# Altium PCB usb_edge.PcbDoc
Units mm, origin at the board's own origin, x right, y up, seen from the top; angles counter-clockwise.
Board outline 38.89 x 12 mm, 2 copper layers (Top Layer, Bottom Layer), stack 0.78 mm thick; 43 components, 27 nets, 161 pads, 48 vias.
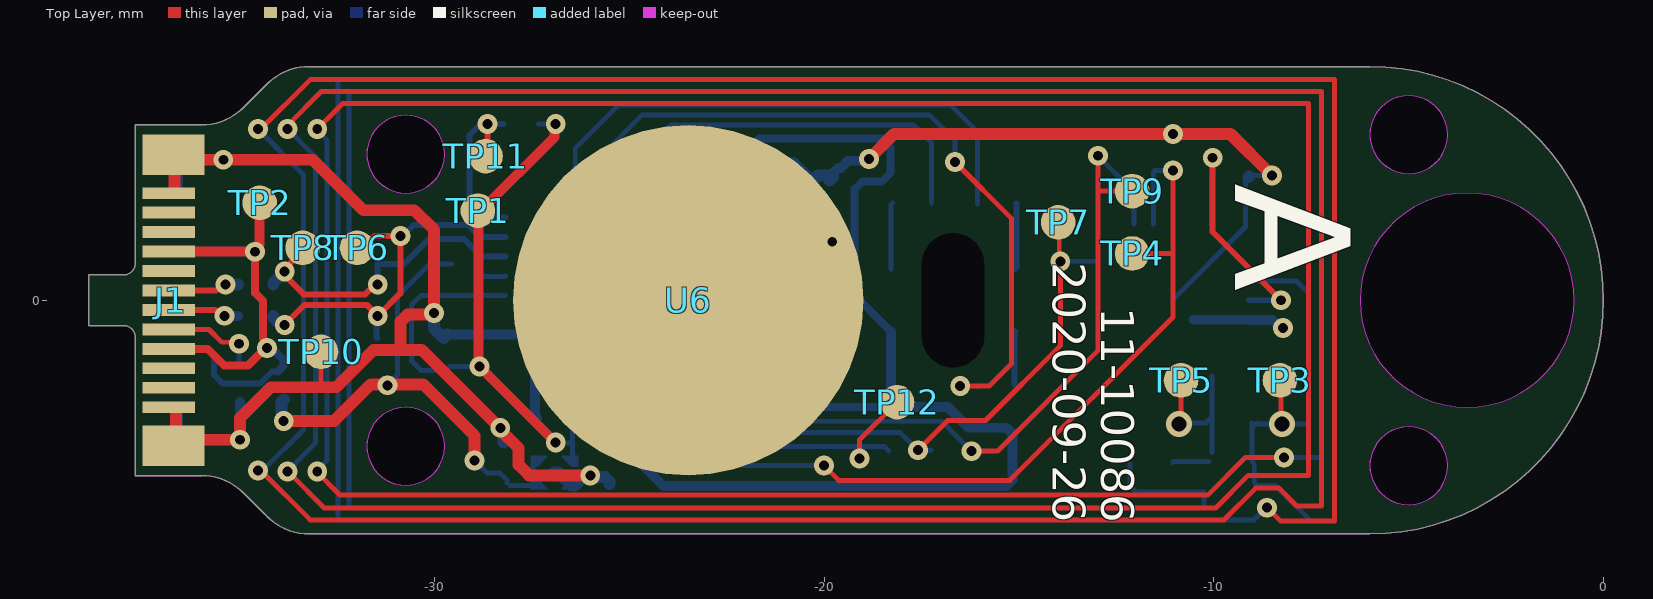
[diagram p0: Top Layer view]
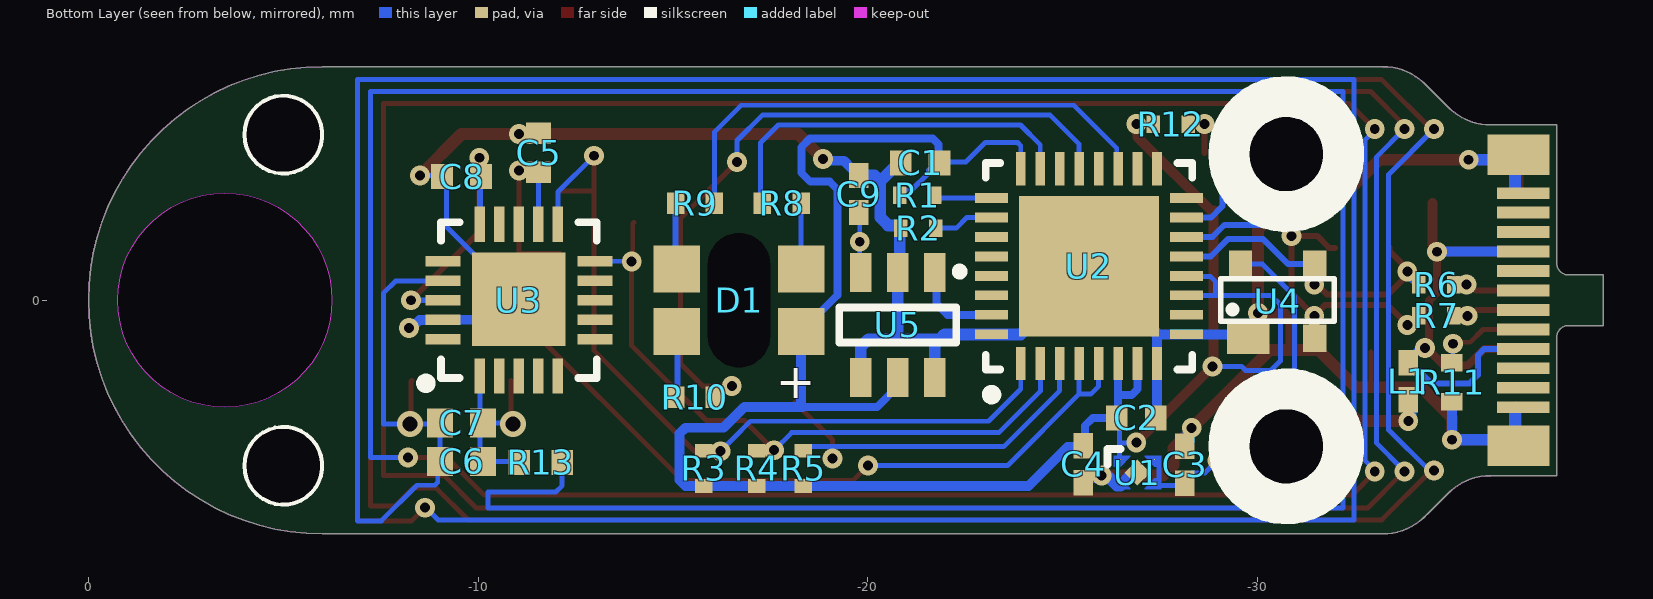
[diagram p1: Bottom Layer view, seen from below]
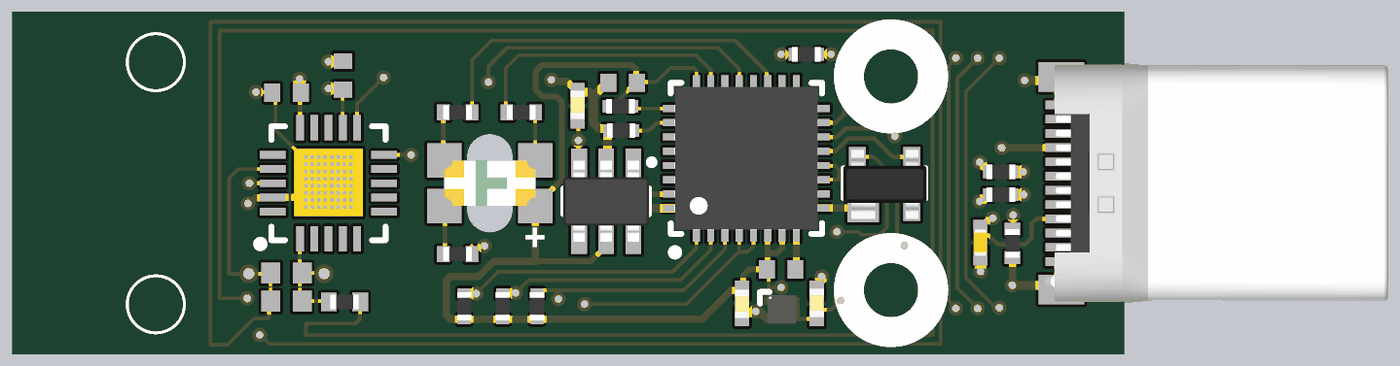
[diagram p2: 3D render of the assembled board from below, using the file's embedded part models]

## Layer stack, top to bottom
Top Solder: solder mask 0.01, Solder Resist, Dk 3.5
Top Layer: signal copper 0.035
Dielectric1: dielectric 0.71, FR-4, Dk 4.8
Bottom Layer: signal copper 0.035
Bottom Solder: solder mask 0.01, Solder Resist, Dk 3.5

## Board outline
-37.694,-4.15 -37.694,-4.5 -36,-4.5 cw(c-36.005,-6.052) -34.857,-5.008 -34.368,-5.492 ccw(c-33.22,-4.448) -33.225,-6 -6,-6 ccw(c-6,0) 0,0 ccw(c-6,0) -6,6 -33.225,6 ccw(c-33.22,4.448) -34.368,5.492 -34.857,5.008 cw(c-36.005,6.052) -36,4.5 -37.694,4.5 -37.694,4.15 -37.694,0.95 cw(c-37.994,0.95) -37.994,0.65 -38.894,0.65 -38.894,-0.65 -37.994,-0.65 cw(c-37.994,-0.95) -37.694,-0.95
cut-out: -6.25,0 ccw(c-3.5,0) -3.5,-2.75 ccw(c-3.5,0) -0.75,0 ccw(c-3.5,0) -3.5,2.75 ccw(c-3.5,0)
cut-out: -6,-4.25 ccw(c-5,-4.25) -5,-5.25 ccw(c-5,-4.25) -4,-4.25 ccw(c-5,-4.25) -5,-3.25 ccw(c-5,-4.25)
cut-out: -6,4.25 ccw(c-5,4.25) -5,3.25 ccw(c-5,4.25) -4,4.25 ccw(c-5,4.25) -5,5.25 ccw(c-5,4.25)
cut-out: -31.75,-3.75 ccw(c-30.75,-3.75) -30.75,-4.75 ccw(c-30.75,-3.75) -29.75,-3.75 ccw(c-30.75,-3.75) -30.75,-2.75 ccw(c-30.75,-3.75)
cut-out: -31.75,3.75 ccw(c-30.75,3.75) -30.75,2.75 ccw(c-30.75,3.75) -29.75,3.75 ccw(c-30.75,3.75) -30.75,4.75 ccw(c-30.75,3.75)

## Design rules (kind name [scope] priority, off if disabled: settings)
Clearance Clearance_1 [HasFootprint('HIROSE_CX60-24S-UNIT') vs OnLayer('Keep-Out Layer')] p1: gap=0 ignorepadtopadclearanceinfootprint=FALSE
Clearance [All] p2: gap=0.127 ignorepadtopadclearanceinfootprint=FALSE
ComponentClearance [All] p1: gap=0 collisioncheckmode=3 verticalgap=0.254 showdistances=FALSE
HoleSize [All] p1: absolutevalues=TRUE maxlimit=6.35 minlimit=0.025 maxpercent=80.000 minpercent=20.000
MinimumSolderMaskSliver [All] p1: minsoldermaskwidth=0.025
PolygonConnect [All] p1: connectstyle=Relief reliefconductorwidth=0.254 reliefentries=4 polygonreliefangle="90 Angle" airgapwidth=0.254
RoutingVias [All] p1: holewidth=0.254 width=0.508 viastyle="Through Hole" minholewidth=0.254 minwidth=0.508 maxholewidth=1.27 maxwidth=1.905
SilkToSilkClearance [All] p1: silktosilkclearance=0
SilkToSolderMaskClearance SilkscreenOverComponentPads [IsPad] p1: minsilkscreentomaskgap=0 clearancetoexposedcopper=TRUE
SolderMaskExpansion [All] p1: expansion=0.102 istentingtop=FALSE
SupplyNets "Schematic Supply Nets_3" [InNet('GND')] p1: voltage=0.000
SupplyNets "Schematic Supply Nets_2" [InNet('+3v3')] p2: voltage=0.000
SupplyNets "Schematic Supply Nets_1" [InNet('+VBUS')] p3: voltage=0.000
SupplyNets "Schematic Supply Nets" [InNet('+5v0-VBUS')] p4: voltage=0.000
Width "Schematic Width Constraint_1" [InNet('LA')] p1: maxlimit=0.127 minlimit=0.127 preferedwidth=0.127
Width "Schematic Width Constraint" [InNet('LB')] p2: maxlimit=0.127 minlimit=0.127 preferedwidth=0.127
Width [All] p3: maxlimit=5.08 minlimit=0.127 preferedwidth=0.127
25 further rules are at their usual default settings.

## Components (designator, comment, footprint, x,y, rotation, side; value= is the part's Value field where it differs from the comment)
C1 "0.1µF" C0402_0.55MM_MD -21.35,3.525 r180 bottom
C2 "0.1µF" C0402_0.55MM_MD -26.899,-3.023 r0 bottom
C3 "1µF" C0402_0.55MM_HD -28.146,-4.224 r270 bottom
C4 "1µF" C0402_0.55MM_HD -25.534,-4.21 r90 bottom
C5 "0.1µF" C0402_0.55MM_MD -11.557,3.785 r270 bottom
C6 "0.1pF" C0402_0.55MM_LD -9.576,-4.14 r0 bottom
C7 "75pF" C0402_0.55MM_LD -9.576,-3.15 r0 bottom
C8 "0.1µF" C0402_0.55MM_MD -9.576,3.175 r0 bottom
C9 "10pF" C0402_0.55MM_HD -19.775,2.725 r270 bottom
D1 "156120M173000" "WURTH_WL-SFRW_1206 RECTANGULAR_REVERSE USE" -16.7,0 r0 bottom
J1 "632712000112" 632712000112 -37.694,0 r270 top
L1 "ACML-0402HC-221-T" C0402_HD -33.884,-2.083 r270 bottom
R1 "10kΩ" R0402_0.40MM_HD -21.275,2.7 r180 bottom
R2 "10kΩ" R0402_0.40MM_HD -21.3,1.85 r0 bottom
R3 "10kΩ" R0402_0.40MM_HD -15.8,-4.318 r90 bottom
R4 "10kΩ" R0402_0.40MM_HD -17.15,-4.318 r90 bottom
R5 "10kΩ" R0402_0.40MM_HD -18.35,-4.318 r90 bottom
R6 "33" R0402_0.40MM_HD -34.6,0.4 r0 bottom
R7 "33" R0402_0.40MM_HD -34.6,-0.4 r0 bottom
R8 "59" R0402_0.40MM_MD -17.8,2.489 r180 bottom
R9 "287" R0402_0.40MM_MD -15.57,2.489 r0 bottom
R10 "59" R0402_0.40MM_MD -15.57,-2.489 r0 bottom
R11 "5.1k" R0402_0.40MM_MD -35.001,-2.108 r90 bottom
R12 "10kΩ" R0402_0.40MM_HD -27.788,4.521 r180 bottom
R13 "0Ω" R0402_0.40MM_LD -11.608,-4.166 r180 bottom
TP1 "SMT Testpoint 35mil" SMT_TP-35#1 -28.9,2.3 r0 top
TP2 "SMT Testpoint 35mil" SMT_TP-35#1 -34.5,2.5 r0 top
TP3 "SMT Testpoint 35mil" SMT_TP-35#1 -8.306,-2.057 r0 top
TP4 "SMT Testpoint 35mil" SMT_TP-35#1 -12.1,1.2 r0 top
TP5 "SMT Testpoint 35mil" SMT_TP-35#1 -10.846,-2.057 r0 top
TP6 "SMT Testpoint 35mil" SMT_TP-35#2 -32,1.35 r0 top
TP7 "SMT Testpoint 35mil" SMT_TP-35#1 -14,2 r0 top
TP8 "SMT Testpoint 35mil" SMT_TP-35#3 -33.397,1.354 r0 top
TP9 "SMT Testpoint 35mil" SMT_TP-35#1 -12.1,2.8 r0 top
TP10 "SMT Testpoint 35mil" SMT_TP-35#1 -32.925,-1.325 r0 top
TP11 "SMT Testpoint 35mil" SMT_TP-35#1 -28.7,3.7 r0 top
TP12 "SMT Testpoint 35mil" SMT_TP-35#1 -18.136,-2.616 r0 top
U1 "TLV74033PDQNR" X2SON -26.927,-4.424 r180 bottom
U2 "MCXA143VFM" QFN50P500X500X65_HS-33N -25.683,0.874 r90 bottom locked
U3 "P71D600P" QFN20 -11.049,0 r90 bottom
U4 "PRTR5V0U2X,215" SOT143B -29.775,-0.975 r180 bottom locked
U5 "TTP223N-BA6" SOT23127P600-8N -20.775,-0.635 r270 bottom
U6 "TOUCH-SENSE-PAD" circular__9.7mm -22.879,0 r180 top locked

## Footprints (in the part's own frame and the unit in brackets; to place one, negate y for a bottom-side part, rotate by r counter-clockwise, add the part's x,y. Pads: shape width x height; smd on the part's side, far side on the other; paste and mask are expansions set on the pad)
632712000112 [mm]
  rect 0.3x1.35 smd: A1(2.75,0.855) A2(2.25,0.855) A3(1.75,0.855) A4(1.25,0.855) A5(0.75,0.855) A6(0.25,0.855) A7(-0.25,0.855) A8(-0.75,0.855) A9(-1.25,0.855) A10(-1.75,0.855) A11(-2.25,0.855) A12(-2.75,0.855)
  rect 0.3x1.35 smd far side: B1(-2.75,0.855) B2(-2.25,0.855) B3(-1.75,0.855) B4(-1.25,0.855) B5(-0.75,0.855) B6(-0.25,0.855) B7(0.25,0.855) B8(0.75,0.855) B9(1.25,0.855) B10(1.75,0.855) B11(2.25,0.855) B12(2.75,0.855)
  rect 1.04x1.6 smd: S1(3.73,0.98) S2(-3.73,0.98)
  rect 1.04x1.6 smd far side: S3(3.73,0.98) S4(-3.73,0.98)
  body extent -4.21,-10.45 4.21,1.55, height 1.46
C0402_0.55MM_HD [mm] "Capacitor 0402 0.55mm Height- High Density"
  rect 0.65x0.5 smd: 1(-0.475,0) 2(0.475,0)
  body extent -0.52,-0.25 0.48,0.25, height 0.55
C0402_0.55MM_LD [mm] "Chip Capacitor, 2-Leads, Body 1.00x0.50mm, IPC Low Density"
  rect 0.66x0.74 smd: 1(-0.55,0) 2(0.55,0)
  body extent -0.5,-0.25 0.5,0.25, height 0.55
C0402_0.55MM_MD [mm] "Chip Capacitor, 2-Leads, Body 1.00x0.50mm, IPC Medium Density"
  rect 0.56x0.64 smd: 1(-0.5,0) 2(0.5,0)
  body extent -0.5,-0.25 0.5,0.25, height 0.55
C0402_HD [mm] "Capacitor 0402 - High Density"
  rect 0.65x0.5 smd: 1(-0.475,0) 2(0.475,0)
  body extent -0.5,-0.25 0.5,0.25, height 0.55
circular__9.7mm [mm]
  round 9 smd paste-2539.97 mask+0.102: 1(0.621,0)
QFN20 [mm] "QFN, 20-Leads, Body 4.0x4.0mm (max), Pitch 0.50mm, IPC High Density"
  rect 0.9x0.27 smd: 1(-1.95,1) 2(-1.95,0.5) 3(-1.95,0) 4(-1.95,-0.5) 5(-1.95,-1) 11(1.95,-1) 12(1.95,-0.5) 13(1.95,0) 14(1.95,0.5) 15(1.95,1)
  rect 0.27x0.9 smd: 6(-1,-1.95) 7(-0.5,-1.95) 8(0,-1.95) 9(0.5,-1.95) 10(1,-1.95) 16(1,1.95) 17(0.5,1.95) 18(0,1.95) 19(-0.5,1.95) 20(-1,1.95)
  rect 2.4x2.4 smd paste-1.27: 21(0.025,0)
  silkscreen extent -2.26,-2 2,2.51, body extent -1.94,-2 2.06,2, height 0.8
QFN50P500X500X65_HS-33N [mm] "QFN, 32-Leads, Body 5.00x5.00mm, Pitch 0.50mm, Thermal Pad 3.60x3.50mm, IPC Medium Density"
  rect 0.85x0.25 smd: 1(-2.5,1.75) 2(-2.5,1.25) 3(-2.5,0.75) 4(-2.5,0.25) 5(-2.5,-0.25) 6(-2.5,-0.75) 7(-2.5,-1.25) 8(-2.5,-1.75) 17(2.5,-1.75) 18(2.5,-1.25) 19(2.5,-0.75) 20(2.5,-0.25) 21(2.5,0.25) 22(2.5,0.75) 23(2.5,1.25) 24(2.5,1.75)
  rect 0.25x0.85 smd: 9(-1.75,-2.5) 10(-1.25,-2.5) 11(-0.75,-2.5) 12(-0.25,-2.5) 13(0.25,-2.5) 14(0.75,-2.5) 15(1.25,-2.5) 16(1.75,-2.5) 25(1.75,2.5) 26(1.25,2.5) 27(0.75,2.5) 28(0.25,2.5) 29(-0.25,2.5) 30(-0.75,2.5) 31(-1.25,2.5) 32(-1.75,2.5)
  rect 3.6x3.6 smd: 33(0,0)
  silkscreen extent -3.42,-2.65 2.65,2.65, body extent -2.51,-2.51 2.51,2.51, height 0.65
R0402_0.40MM_HD [mm] "Resistor 0402 High Density"
  rect 0.35x0.45 smd: 1(-0.45,0) 2(0.45,0)
  body extent -0.5,-0.25 0.5,0.25, height 0.4
R0402_0.40MM_LD [mm] "Resistor 0402 Low Density"
  rect 0.55x0.65 smd: 1(-0.55,0) 2(0.55,0)
  body extent -0.5,-0.25 0.5,0.25, height 0.4
R0402_0.40MM_MD [mm] "Resistor 0402 Medium Density"
  rect 0.45x0.55 smd: 1(-0.5,0) 2(0.5,0)
  body extent -0.5,-0.25 0.5,0.25, height 0.4
SMT_TP-35#1 [mil] ".035\" SMT Test pad"
  round 35 smd paste-10: 1(0,0)
SMT_TP-35#2 [mil] ".035\" SMT Test pad"
  round 35 smd paste-10: 1(0,-0.15)
SMT_TP-35#3 [mil] ".035\" SMT Test pad"
  round 35 smd paste-10: 1(0,-0.31)
SOT143B [mm] "SOT143B"
  rect 1.1x0.8 smd: 1(0,0)
  rect 0.6x0.7 smd: 2(1.702,0) 3(1.702,1.9) 4(-0.2,1.9)
  silkscreen extent -0.71,0.43 2.21,1.52, body extent -0.7,-0.27 2.22,2.15, height 1
SOT23127P600-8N [mm]
  rect 1x0.549 smd: 1(-1.35,0.95) 2(-1.35,0) 3(-1.35,-0.95) 4(1.35,-0.95) 5(1.35,0) 6(1.35,0.95)
  silkscreen extent -1.47,-1.5 0.45,1.69, body extent -1.43,-1.5 1.43,1.5, height 1.26
"WURTH_WL-SFRW_1206 RECTANGULAR_REVERSE USE" [mm] "SMD Full-color Reverse mount LED, body 3.2x1.6mm"
  rect 1.2x1.2 smd: 1(-1.596,0.8) 2(-1.596,-0.8) 3(1.596,-0.8) 4(1.596,0.8)
  oval 0x3.45 hole 1.6 slot 3.45 at 90 deg unplated mask+0: MH1(0,0)
  body extent -1.6,-0.8 1.6,0.8, height 0.28
X2SON [mm]
  round 0.025 smd paste+0 mask+0.05: 1(-0.435,0.335) 2(-0.435,-0.335) 3(0.435,-0.335) 4(0.435,0.335)
  rect 0.48x0.48 smd rot 135 paste+0.002 mask+0.052: 5(0,0)
  silkscreen extent -0.76,0.2 -0.43,0.61, body extent -0.5,-0.5 0.5,0.5, height 0.4

## Part data
C1 C2 C5 C8: library part GCM155R71C104KA55J, "CAP CER 0.1UF 16V X7R 0402", Manufacturer="Murata Electronics", Operating Temperature="-55°C ~ 125°C", Package=402, Ratings=AEC-Q200, Supplier Part Number 1=490-7998-1-ND, Temperature Coefficient=X7R, Tolerance=±10%, Voltage - Rated=16V, Category=Capacitors, ComponentLink1Description="Datasheet (Internal)", ComponentLink1URL=https://psearch.en.murata.com/capacitor/product/GCM155R71C104KA55%23.pdf, ComponentLink2Description="Datasheet (External)", ComponentLink2URL=https://psearch.en.murata.com/capacitor/product/GCM155R71C104KA55%23.pdf, Manufacturer Part Number=GCM155R71C104KA55J, Substitution Notes="0.1µF , 16V , ±10% , X7R , -55°C ~ 125°C , AEC-Q200 , 0402", Supplier 1=Digikey, Thickness (Max)=0.55MM
C3 C4: library part GRT155R70J105KE01D, "CAP CERAMIC 1UF 6.3V X7R 10% PAD", Manufacturer="Murata Electronics", Operating Temperature="-55°C ~ 125°C", Package=0402, Ratings=AEC-Q200, Supplier Part Number 1=490-18216-1-ND, Temperature Coefficient=X7R, Tolerance=±10%, Voltage - Rated=6.3V, Category=Capacitors, ComponentLink1Description="Datasheet (Internal)", ComponentLink1URL=https://search.murata.co.jp/Ceramy/image/img/A01X/G101/ENG/GRT155R70J105KE01-01.pdf, ComponentLink2Description="Datasheet (External)", ComponentLink2URL=https://search.murata.co.jp/Ceramy/image/img/A01X/G101/ENG/GRT155R70J105KE01-01.pdf, Manufacturer Part Number=GRT155R70J105KE01D, Substitution Notes="1µF , 6.3V , ±10% , X7R , -55°C ~ 125°C , AEC-Q200 , 0402", Supplier 1=Digikey, Thickness (Max)=0.55MM
C6: library part GCQ1555C1HR10BB01D, "CAP CER 0.1PF 50V C0G/NP0 0402", Internal Part Number=nan, Manufacturer="Murata Electronics", Operating Temperature="-55°C ~ 125°C", Package=402, Ratings=AEC-Q200, Supplier Part Number 1=490-17533-1-ND, Temperature Coefficient="C0G, NP0", Tolerance=±0.1pF, Voltage - Rated=50V, cad-reference=GCQ1555C1HR10BB01D, Category=Capacitors, ComponentLink1Description="Datasheet (Internal)", ComponentLink1URL=https://search.murata.co.jp/Ceramy/image/img/A01X/G101/ENG/GCQ1555C1HR10BB01-01.pdf, ComponentLink2Description="Datasheet (External)", ComponentLink2URL=https://search.murata.co.jp/Ceramy/image/img/A01X/G101/ENG/GCQ1555C1HR10BB01-01.pdf, JLCPCB Part #=nan, kicad-footprint=C0402_0.55MM_MD:C0402_0.55MM_MD, kicad-symbol=Capacitor:C_2P_NP, Manufacturer Part Number=GCQ1555C1HR10BB01D, Substitution Notes="0.1pF , 50V , ±0.1pF , C0G, NP0 , -55°C ~ 125°C , AEC-Q200 , 0402", Supplier 1=Digikey, Thickness (Max)=0.55MM
C7: library part GCM1555C1H750FA16J, "CAP CER 75PF 50V C0G/NP0 0402", Manufacturer="Murata Electronics", Operating Temperature="-55°C ~ 105°C", Package=402, Ratings=AEC-Q200, Temperature Coefficient="C0G, NP0", Tolerance=±1%, Voltage - Rated=50V, cad-reference=GCM1555C1H750FA16J, Category=Capacitors, kicad-footprint=C0402_0.55MM_MD:C0402_0.55MM_MD, kicad-symbol=Capacitor:C_2P_NP, Manufacturer Part Number=GCM1555C1H750FA16J, Substitution Notes="75pF , 50V , ±1% , C0G, NP0 , -55°C ~ 125°C , AEC-Q200 , 0402", Thickness (Max)=0.55MM
C9: library part GCQ1555C1H100JB01D, "CAP CER 10PF 50V C0G/NP0 0402", Manufacturer="Murata Electronics", Operating Temperature="-55°C ~ 125°C", Package=0402, Ratings=AEC-Q200, Supplier Part Number 1=490-17423-1-ND, Temperature Coefficient="C0G, NP0", Tolerance=±5%, Voltage - Rated=50V, Category=Capacitors, ComponentLink1Description="Datasheet (Internal)", ComponentLink1URL=https://search.murata.co.jp/Ceramy/image/img/A01X/G101/ENG/GCQ1555C1H100JB01-01.pdf, ComponentLink2Description="Datasheet (External)", ComponentLink2URL=https://search.murata.co.jp/Ceramy/image/img/A01X/G101/ENG/GCQ1555C1H100JB01-01.pdf, Manufacturer Part Number=GCQ1555C1H100JB01D, Substitution Notes="10pF , 50V , ±5% , C0G, NP0 , -55°C ~ 125°C , AEC-Q200 , 0402", Supplier 1=Digikey, Thickness (Max)=0.55MM
D1: "Wl-sfrw SMT Full-color Reverse M", Manufacturer="Würth Elektronik", Supplier Part Number 1=732-13408-1-ND, Category=Diodes, CategorySort=400, Manufacturer Part Number=156120M173000, Pricing 1="1 = 0.96000, 10 = 0.82500, 50 = 0.72340, 250 = 0.64632, 500 = 0.57730 (USD)", Stock 1=2978, Supplier 1=Digikey
J1: "USB-C (USB TYPE-C) USB 3.2 Gen 2 (USB 3.1 Gen 2, Superspeed + (USB 3.1)) Plug Connector 24 Position Board Edge, Straddle Mount", Manufacturer="Würth Elektronik", cad-reference=632712000112, classification=connector/USB, id=019a404e-48ff-7478-bb0c-33fa9a6e0fc4, kicad-footprint=632712000112, kicad-footprint-path=footprints\632712000112.kicad_mod, kicad-symbol=632712000112, kicad-symbol-path=symbols\632712000112.kicad_sym, Manufacturer Part Number=632712000112
L1: "Ind Chip Bead Multi-Layer 220Ohm 25% 100MHz Ferrite 1A 0402 T/R", Case Code (Imperial)=0402, Case Code (Metric)=1005, Current Rating=1A, DC Resistance (DCR)=250mR, Manufacturer=Abracon, Max Operating Temperature=125°C, Min Operating Temperature=-55°C, Package Quantity=1, Supplier Part Number 1=815-ACML-0402HC-221T, Test Frequency=100MHz, Tolerance=25%, Case/Package=0402, Category="Ferrite Beads and Chips", ComponentLink1Description=https://datasheet.ciiva.com/41798/acml-0402hc-41798311.pdf?src-supplier=Digikey, ComponentLink1URL=https://datasheet.ciiva.com/41798/acml-0402hc-41798311.pdf?src-supplier=Digikey, Height=0.026inch, Impedance=220R, Length=0.039inch, Manufacturer Part Number=ACML-0402HC-221-T, Max Current Rating=1A, Max DC Current=1A, Mounting Technology="Surface Mount", Number of Channels=1, Number of Lines=1, Packaging="Tape and Reel", Pricing="1=0.1, 10=0.032, 50=0.032, 100=0.023, 1000=0.015, 10000=0.015 (USD)", RoHS=Yes, RoHS Compliant=Yes, Series=ACML-HC, Shielding=Unshielded, Stock 1=3420, Supplier 1=Mouser, Termination=SMD/SMT, Weight=2.3E-05oz, Width=0.02inch
R1 R2 R3 R4 R5 R12: library part ERJ-2RKF1002X, "RES 10K OHM 1/10W 1% 0402 SMD", Limiting Element Voltage=50, Manufacturer="Panasonic Electronic Components", Maximum Overload Voltage=100, Maximum Working Voltage=31.6V, Package="0402 (1005 Metric)", Package Power="0402  (0.1W)", Power (Watts)="0.1W- 1/10W", Ratings=AEC-Q200, Resistance (Ohms)=10k, Sort Value=10000, Sort Value Package=402_10000, Supplier Package=402, Supplier Part Number 1=P10.0KLCT-ND, Temperature Coefficient=±100ppm/°C, Tolerance=±1%, Category=Resistors, Composition="Thick Film", Features=0, Height=0.40MM, Manufacturer 1="Panasonic Electronic Components", Manufacturer Part Number=ERJ-2RKF1002X, Manufacturer Part Number 1=ERJ-2RKF1002X, Packaging="Cut Tape (CT)", Substitution Notes="10k , ±1% , 0402 , AEC-Q200", Supplier 1=Digi-Key
R6 R7: library part ERJ-2RKF33R0X, "RES 33 OHM 1/10W 1% 0402 SMD", Limiting Element Voltage=50, Manufacturer="Panasonic Electronic Components", Maximum Overload Voltage=100, Maximum Working Voltage=1.8V, Package="0402 (1005 Metric)", Package Power="0402  (0.1W)", Power (Watts)="0.1W- 1/10W", Ratings=AEC-Q200, Sort Value Package=402_33, Supplier Package=0402, Supplier Part Number 1=P33.0LCT-ND, Temperature Coefficient=±100ppm/°C, Tolerance=±1%, Category=Resistors, ComponentLink1Description="Internal Datasheet", ComponentLink1URL="datasheets\Panasonic Electronic Components\AOA0000CE2.pdf", ComponentLink2Description="External Datasheet", ComponentLink2URL=http://industrial.panasonic.com/www-data/pdf/AOA0000/AOA0000CE2.pdf, Composition="Thick Film", Features=-, Height=0.40MM, Manufacturer Part Number=ERJ-2RKF33R0X, Number of Terminations=2, Packaging="Cut Tape (CT)", Resistance (Ohms)=33, Size / Dimension="0.039\" L x 0.020\" W (1.00mm x 0.50mm)", Sort Value=33, Substitution Notes="33 , ±1% , 0402 , AEC-Q200", Supplier 1=Digi-Key
R8 R10: library part ERJ-2RKF59R0X, "RES 59 OHM 1/10W 1% 0402 SMD", Limiting Element Voltage=50, Manufacturer="Panasonic Electronic Components", Maximum Overload Voltage=100, Maximum Working Voltage=2.4V, Package="0402 (1005 Metric)", Package Power="0402  (0.1W)", Power (Watts)="0.1W- 1/10W", Ratings=AEC-Q200, Sort Value Package=402_59, Supplier Package=0402, Supplier Part Number 1=P59.0LCT-ND, Temperature Coefficient=±100ppm/°C, Tolerance=±1%, Category=Resistors, ComponentLink1Description="Internal Datasheet", ComponentLink1URL="datasheets\Panasonic Electronic Components\AOA0000CE2.pdf", ComponentLink2Description="External Datasheet", ComponentLink2URL=http://industrial.panasonic.com/www-data/pdf/AOA0000/AOA0000CE2.pdf, Composition="Thick Film", Features=-, Height=0.40MM, Manufacturer Part Number=ERJ-2RKF59R0X, Number of Terminations=2, Packaging="Cut Tape (CT)", Resistance (Ohms)=59, Size / Dimension="0.039\" L x 0.020\" W (1.00mm x 0.50mm)", Sort Value=59, Substitution Notes="59 , ±1% , 0402 , AEC-Q200", Supplier 1=Digi-Key
R9: library part ERJ-2RKF2870X, "RES 287 OHM 1/10W 1% 0402 SMD", Limiting Element Voltage=50, Manufacturer="Panasonic Electronic Components", Maximum Overload Voltage=100, Maximum Working Voltage=5.4V, Package="0402 (1005 Metric)", Package Power="0402  (0.1W)", Power (Watts)="0.1W- 1/10W", Ratings=AEC-Q200, Sort Value Package=402_287, Supplier Package=0402, Supplier Part Number 1=P287LCT-ND, Temperature Coefficient=±100ppm/°C, Tolerance=±1%, Category=Resistors, ComponentLink1Description="Internal Datasheet", ComponentLink1URL="datasheets\Panasonic Electronic Components\AOA0000CE2.pdf", ComponentLink2Description="External Datasheet", ComponentLink2URL=http://industrial.panasonic.com/www-data/pdf/AOA0000/AOA0000CE2.pdf, Composition="Thick Film", Features=-, Height=0.40MM, Manufacturer Part Number=ERJ-2RKF2870X, Number of Terminations=2, Packaging="Cut Tape (CT)", Resistance (Ohms)=287, Size / Dimension="0.039\" L x 0.020\" W (1.00mm x 0.50mm)", Sort Value=287, Substitution Notes="287 , ±1% , 0402 , AEC-Q200", Supplier 1=Digi-Key
R11: library part ERJ-2RKF5101X, "RES 5.1K OHM 1/10W 1% 0402 SMD", Limiting Element Voltage=50, Manufacturer="Panasonic Electronic Components", Maximum Overload Voltage=100, Maximum Working Voltage=22.6V, Package="0402 (1005 Metric)", Package Power="0402  (0.1W)", Power (Watts)="0.1W- 1/10W", Ratings=AEC-Q200, Sort Value=5100, Sort Value Package=402_5100, Supplier Package=0402, Supplier Part Number 1=P5.10KLCT-ND, Temperature Coefficient=±100ppm/°C, Tolerance=±1%, Category=Resistors, ComponentLink1Description="Internal Datasheet", ComponentLink1URL="datasheets\Panasonic Electronic Components\AOA0000CE2.pdf", ComponentLink2Description="External Datasheet", ComponentLink2URL=http://industrial.panasonic.com/www-data/pdf/AOA0000/AOA0000CE2.pdf, Composition="Thick Film", Features=-, Height=0.40MM, Manufacturer Part Number=ERJ-2RKF5101X, Number of Terminations=2, Packaging="Cut Tape (CT)", Resistance (Ohms)=5.1k, Size / Dimension="0.039\" L x 0.020\" W (1.00mm x 0.50mm)", Substitution Notes="5.1k , ±1% , 0402 , AEC-Q200", Supplier 1=Digi-Key
R13: library part ERJ-2GE0R00X, "RES 0.0 OHM 1/10W JUMP 0402 SMD", Internal Part Number=nan, JLCPCB Part #=C242160, Limiting Element Voltage=50, Manufacturer="Panasonic Electronic Components", Maximum Overload Voltage=100, Maximum Working Voltage=0.0V, Package="0402 (1005 Metric)", Package Power="0402  (0.1W)", Power (Watts)="0.1W- 1/10W", Ratings=AEC-Q200, Resistance (Ohms)=0, Sort Value Package=402_0, Supplier Package=402, Supplier Part Number 1=P0.0JCT-ND, Temperature Coefficient=-, Tolerance=Jumper, cad-reference=ERJ-2GE0R00X, Category=Resistors, Composition="Thick Film", Features=-, Height=0.40MM, kicad-footprint=R0402_0.40MM_HD:R0402_0.40MM_HD, kicad-symbol=Resistor:R_2P, Manufacturer 1="Panasonic Electronic Components", Manufacturer Part Number=ERJ-2GE0R00X, Manufacturer Part Number 1=ERJ-2GE0R00X, Number of Terminations=2, Sort Value=0, Substitution Notes="0 , Jumper , 0402 , AEC-Q200", Supplier 1=Digi-Key
TP1 TP2 TP3 TP4 TP5 TP6 TP7 TP8 TP9 TP10 TP11 TP12: library part SMT_TP-35, Manufacturer=Wavenumber, Flags=no-bom, Manufacturer Part Number=SMT_TP-35
U1: "IC REG LIN 3.3V 300MA 4X2SON", JLCPCB Part #=C3746074, Manufacturer="Texas Instruments", Manufacturer Part Number=TLV74033PDQNR
U2: "ARM Microcontrollers - MCU MCXA18,128KB Flash, 32KB RAM, 32QFP", Manufacturer=NXP, Manufacturer Part Number=MCXA143VFM
U3: "SmartMX3 P71D600 Secure NFC Processor", Manufacturer=NXP, Manufacturer Part Number=P71D600P
U4: library part D1213A-02SR-7, "ESD Protection Diodes / TVS Diodes 2 Ch TVS Diode Array 3.3V 6.0A 400mW", Capacitance @ Frequency="1pF @ 1MHz", Current - Peak Pulse (10/1000µs)=-, Manufacturer="NXP Semiconductors", Operating Temperature="-40°C ~ 85°C (TA)", Package / Case="TO-253-4, TO-253AA", Power Line Protection=Yes, Supplier Device Package=SOT-143B, Supplier Part Number 1=568-4140-1-ND, Voltage - Breakdown (Min)=6V, Voltage - Reverse Standoff (Typ)="5.5V (Max)", Applications="General Purpose", Bidirectional Channels=2, Category="Circuit Protection", ComponentLink1Description=http://www.nxp.com/documents/data_sheet/PRTR5V0U2X.pdf, ComponentLink1URL=http://www.nxp.com/documents/data_sheet/PRTR5V0U2X.pdf, Manufacturer Part Number=PRTR5V0U2X,215, Mounting Type="Surface Mount", Packaging="Cut Tape (CT)", Power - Peak Pulse=-, Pricing="1=0.57, 10=0.477, 25=0.418, 100=0.3578, 250=0.31036, 500=0.26286, 1000=0.20265 (USD)", RoHS="RoHS Compliant", Stock=11734, Supplier 1=Digi-Key, Type="Steering (Rail to Rail)", Unidirectional Channels=-, Voltage - Clamping (Max) @ Ipp=-
U5: library part TTP223-BA6, "SOT-23-6  Touch Sensors ROHS", Manufacturer="TonTek Design Technology LTD", Manufacturer Part Number=TTP223N-BA6
U6: library part TOUCH_SENSE_PAD, "PCB touch sense pad. It is to be covered with soldermask and silkscreen."

## Via types
v1: diameter 0.508, hole 0.254, Top Layer to Bottom Layer, tented both sides, 46 vias
v2: diameter 0.66, hole 0.381, Top Layer to Bottom Layer, 2 vias

## Nets (pads, with @x,y where several pads share a name; then routed paths per layer and width w, separated by ;. In a path a pad name is that pad's centre, name@x,y a point inside that pad or via, vN(x,y) a via of type N, cw(c..) or ccw(c..) an arc to the next point about the centre after c; other vN are vias at no path point)
+3v3: C1.2 C2.2 C4.2 D1.1 R1.1 R3.1 R4.1 R5.1 R12.1 TP1.1 U1.1 U2.6 U2.7 U2.11 U2.12 U2.24 U5.5 | length 57.6
  Top Layer w0.127: v1@-26.932,4.493 v1(-26.9,4.525)
  Top Layer w0.254: TP1.1 -28.877,2.277 -28.877,-1.679 v1(-28.854,-1.702) v1(-26.901,-3.655) ; TP1.1@-28.815,2.3 -26.932,4.183 v1@-26.932,4.493
  Bottom Layer w0.127: -28.931,0.125 -28.931,0.483 -28.801,0.612 -28.195,0.612 U2.12 ; v1(-28.854,-1.702) -29.604,-1.702 -29.706,-1.803 -30.353,-1.803 -30.601,-1.556 -30.601,-0.121 -30.356,0.124 -28.931,0.124 U2.11 ; R12.1 -27.334,4.525 v1(-26.9,4.525) ; v1(-26.901,-3.655) -26.895,-3.661 -26.467,-3.661 ; U1.1 -26.467,-4.064 -26.467,-3.661 ; C2.2@-26.424,-3.023 -26.467,-3.066 -26.467,-3.661 ; U2.24 -23.933,3.967 -23.85,4.05 -23.025,4.05 -22.525,3.55 -21.825,3.55 -21.825,3.525 -21.75,3.525 -21.564,3.338 -21.564,3.263 -21.116,2.816 -20.937,2.816 -20.825,2.705 R1.1
  Bottom Layer w0.203: U2.7 -26.933,-2.283 -26.778,-2.438 -26.433,-2.438 ; U2.6 -26.433,-2.438 ; C2.2@-26.424,-3.023 -26.433,-3.013 -26.433,-2.438 ; C2.2@-26.288,-3.023 -25.781,-3.023 -25.578,-3.226 C4.2@-25.578,-3.767 ; C1.2@-21.825,3.55 -21.825,4 -21.675,4.15 -18.524,4.15 -18.3,3.926 -18.3,3.275 -18.531,3.044 -19.031,3.044 -19.224,2.851 -19.224,0.128 D1.1 ; U5.5 -20.775,-2.21 -20.246,-2.739 -18.331,-2.739
  Bottom Layer w0.254: C4.2@-25.578,-3.767 -25.133,-3.767 -24.132,-4.768 R5.1 R4.1 R3.1 -15.324,-4.768 -15.175,-4.619 -15.175,-3.424 -15.324,-3.275 -16.3,-3.275 -16.836,-2.739 -18.331,-2.739 -18.296,-2.704 D1.1 ; U5.5 U5.5@-20.627,-2.133
+5v0-VBUS: C3.2 L1.2 U1.3 U1.4 U4.4 | length 13.8
  Top Layer w0.305: v1(-33.884,-3.099) -32.585,-3.099 -31.645,-2.159 -31.217,-2.159 -30.302,-2.159 -28.981,-3.48 v1@-28.981,-4.087
  Bottom Layer w0.127: v1(-31.217,-2.184) -31.217,-2.174 -30.963,-1.92 -30.963,0.102 -30.139,0.925 U4.4 ; v1(-28.981,-4.115) -28.659,-4.437 -28.333,-4.437 -28.146,-4.624 C3.2 ; C3.2@-28.067,-4.768 -28.059,-4.759 U1.3 -27.483,-4.639 -27.483,-4.21 U1.4
  Bottom Layer w0.305: v1(-33.884,-3.099) -33.934,-3.048 -33.934,-2.609 L1.2 L1.2@-33.871,-2.545
+VBUS: J1.A4 J1.A9 J1.B4 J1.B9 L1.1 TP2.1 | length 15
  Top Layer w0.203: J1.A4@-36.644,-1.25 -35.834,-1.25 -35.41,-1.674 -34.799,-1.674 -34.352,-1.227 v1(-34.313,-1.227) ; v1(-34.62,1.245) -34.62,0.191 -34.417,-0.013 -34.417,-0.987 -34.371,-1.033 -34.371,-1.168 v1@-34.292,-1.248
  Top Layer w0.254: J1.A9@-36.644,1.25 -36.641,1.247 -34.623,1.247 v1(-34.62,1.245) -34.62,1.313 -34.5,1.434 TP2.1
  Bottom Layer w0.152: J1.B9@-36.644,-1.25 -35.832,-1.25 -35.672,-1.41 -35.672,-1.917 -35.449,-2.14 -34.491,-2.14 -34.182,-1.831 L1.1@-34.032,-1.831
  Bottom Layer w0.203: v1(-34.313,-1.227) -34.254,-1.285 -34.131,-1.285 -33.884,-1.533 -33.884,-1.683 L1.1@-34.032,-1.831
  Bottom Layer w0.254: J1.B4@-36.644,1.25 -36.641,1.247 -34.623,1.247 v1(-34.62,1.245)
BLUE: R8.1 U2.23 | length 9.7
  Bottom Layer w0.127: U2.23 -24.433,3.99 -23.926,4.497 -17.709,4.497 -17.25,4.038 R8.1@-17.25,2.5
BOOT: R12.2 TP11.1 U2.15 | length 4.6
  Top Layer w0.152: TP11.1@-28.65,3.775 v1(-28.65,4.525)
  Bottom Layer w0.152: R12.2 -28.24,4.523 -28.648,4.523 v1(-28.65,4.525) -28.718,4.457 -28.893,4.457 -29.108,4.242 -29.108,2.413 -28.82,2.124 U2.15
DM: J1.A7 R6.1 | length 1.7
  Top Layer w0.152: J1.A7@-36.644,0.25 -35.621,0.25 -35.471,0.4 v1(-35.375,0.4)
  Top Layer w0.305: v1@-35.43,0.4 v1(-35.375,0.4)
  Bottom Layer w0.305: v1(-35.375,0.4) R6.1
DM_MCU: R6.2 TP8.1 U2.13 U4.3 | length 8.3
  Top Layer w0.152: TP8.1@-33.397,1.354 -33.397,1.272 -33.858,0.811 -33.858,0.64 -33.37,0.152 -31.788,0.152 -31.534,0.406 v1(-31.471,0.406)
  Bottom Layer w0.152: v1(-31.471,0.406) -31.471,0.919 U4.3 -30.8,0.925 -30.15,1.575 -29.261,1.575 -28.81,1.124 U2.13
  Bottom Layer w0.305: R6.2 -34.15,0.45 -33.863,0.737 v1(-33.858,0.737)
DP: J1.A6 R7.1 | length 1.7
  Top Layer w0.152: J1.A6@-36.644,-0.25 -35.646,-0.25 -35.496,-0.4 v1(-35.4,-0.4)
  Top Layer w0.254: v1@-35.469,-0.4 v1(-35.4,-0.4)
  Bottom Layer w0.254: v1(-35.4,-0.4) R7.1
DP_MCU: R7.2 TP6.1 U2.14 U4.2 | length 10.3
  Top Layer w0.152: v1@-33.909,-0.635 -33.871,-0.635 -33.363,-0.127 -31.738,-0.127 -31.471,-0.394 v1(-31.471,-0.406) -30.886,0.178 v1(-30.886,1.651) -31.542,1.651 -31.847,1.346 TP6.1
  Bottom Layer w0.152: v1@-31.496,-0.406 -31.496,-0.956 U4.2 ; v1(-30.886,1.651) -30.823,1.651 -30.543,1.93 -29.159,1.93 -28.853,1.624 U2.14
  Bottom Layer w0.305: R7.2 -34.15,-0.45 -34.004,-0.596 -33.897,-0.596 v1(-33.858,-0.635)
GND: C1.1 C2.1 C3.1 C4.1 C5.1 C8.2 C9.1 J1.A1 J1.A12 J1.B1 J1.B12 J1.S1 J1.S2 J1.S3 J1.S4 R2.2 R11.1 TP10.1 U1.2 U1.5 U2.8 U2.9 U2.32 U2.33 U3.19 U3.21 U4.1 U5.2 U5.4 U5.6 | length 79.3
  Top Layer w0.127: -32.93,-2.235 -32.925,-2.23 TP10.1
  Top Layer w0.254: v1@-8.192,-0.749 v1(-8.23,-0.711) v1@-8.185,-0.666
  Top Layer w0.305: J1.A12@-36.682,2.891 -36.682,3.65 -36.638,3.607 v1(-35.433,3.607) -33.132,3.607 -31.836,2.311 -30.531,2.311 -30.023,1.803 v1(-30.023,-0.33) -30.062,-0.369 -30.705,-0.369 -30.883,-0.548 -30.883,-1.276 ; J1.S1@-36.644,-3.64 J1.A1@-36.644,-2.75 ; J1.S1@-36.644,-3.6 -36.612,-3.632 -36.561,-3.581 v1(-35.001,-3.581) -35.001,-3.023 -34.214,-2.235 -32.93,-2.235 -32.535,-2.235 -31.576,-1.276 -30.883,-1.276 ; v1(-26.011,-4.5) -26.015,-4.496 -27.584,-4.496 -27.851,-4.229 -27.851,-3.802 -28.321,-3.332 v1(-28.321,-3.277) -28.34,-3.277 -30.341,-1.276 -30.883,-1.276 ; v1(-18.854,3.629) -18.215,4.267 v1(-11.049,4.267) -9.576,4.267 v1(-8.509,3.2)
  Bottom Layer w0.127: U3.21 -9.195,1.88 -9.195,3.081 C8.2@-9.119,3.157 ; C8.2 -9.05,3.2 v1(-8.509,3.2)
  Bottom Layer w0.254: v1(-35.001,-3.581) R11.1 ; U4.1@-29.676,-0.876 U2.9 U2.33@-27.433,-0.876 ; C2.1@-27.374,-3.023 -27.433,-2.963 U2.8 U2.33@-27.433,-0.876 ; U2.33 U2.33@-27.433,-0.876 ; C9.1 -19.775,3.275 -19.652,3.398 -19.577,3.398 -19.395,3.58 -18.902,3.58 v1(-18.854,3.629) ; U3.21@-10.524,-0.5 U3.19 -9.091,-0.508 -8.502,-0.508 -8.298,-0.711 v1(-8.23,-0.711)
  Bottom Layer w0.305: J1.S3@-36.644,-3.64 J1.S3@-36.622,-3.618 ; J1.S3@-36.622,-3.742 J1.S3@-36.622,-3.64 ; J1.B12@-36.622,-2.852 J1.S3@-36.622,-3.618 ; J1.B1@-36.622,2.826 -36.622,3.64 -36.589,3.607 v1(-35.433,3.607) ; v1(-35.001,-3.581) -36.585,-3.581 J1.S3@-36.622,-3.618 ; v1(-30.023,-0.33) -30.023,-0.727 U4.1 U4.1@-29.676,-0.876 ; v1(-28.321,-3.277) -28.321,-3.332 -28.244,-3.409 -28.244,-3.64 C3.1@-28.227,-3.657 ; U2.33@-27.406,-0.848 U2.33 -23.933,-0.876 U2.32 -21.974,-0.876 -21.85,-1 ; U1.5 -26.827,-4.424 U1.2 -26.407,-4.759 -26.187,-4.539 -26.049,-4.539 v1@-26.02,-4.51 ; v1(-26.011,-4.5) -25.972,-4.539 -25.631,-4.539 -25.515,-4.656 C4.1@-25.515,-4.722 ; U5.6 -21.725,-1.125 -21.85,-1 ; C1.1@-20.875,3.525 -20.8,3.525 -20.325,3.05 ; -20.775,-0.838 U5.2 -20.827,0.767 -20.827,1.827 R2.2 -20.85,1.9 -20.827,1.923 -20.527,1.923 -20.325,2.125 -20.325,3.05 ; C9.1@-19.873,3.068 -19.775,3.166 C9.1 ; C9.1@-19.873,3.2 -20.175,3.2 -20.325,3.05 ; U5.4 -19.825,-1.2 -20.025,-1 -21.85,-1 ; C5.1@-11.557,4.26 -11.553,4.263 -11.053,4.263 v1(-11.049,4.267) ; C8.2@-9.119,3.157 C8.2@-9.101,3.175
GREEN: R10.1 U2.21 | length 17.9
  Top Layer w0.127: v1(-16.65,3.55) -15.2,2.1 -15.2,-1.638 -15.762,-2.2 v1(-16.515,-2.2)
  Bottom Layer w0.127: U2.21 -25.433,4.005 -24.688,4.751 -17.301,4.751 -16.65,4.1 v1(-16.65,3.55) ; -16.075,-2.2 R10.1@-16.05,-2.225
LA: C6.2 C7.2 R13.2 TP3.1 U3.17 | length 377.5
  Top Layer w0.127: v1(-34.544,4.394) -34.468,4.394 -33.198,5.664 -6.909,5.664 -6.909,-5.664 ; v1@-34.471,-4.372 -33.204,-5.639 -9.741,-5.639 -8.928,-4.826 -8.328,-4.826 -7.871,-5.283 -7.239,-5.283 ; v1(-33.782,4.394) -33.782,4.496 -32.918,5.359 -7.239,5.359 -7.239,-5.283 ; v1@-33.706,-4.369 -33.706,-4.47 -32.841,-5.335 -9.958,-5.335 -9.118,-4.495 -7.569,-4.495 -7.569,5.055 -32.36,5.055 v1(-33.02,4.394) ; v1@-33.045,-4.394 -32.436,-5.004 -10.16,-5.004 -9.195,-4.039 v1@-8.331,-4.039 ; v1(-8.636,-5.326) -8.298,-5.664 -6.909,-5.664 ; TP3.1 -8.28,-2.083 -8.28,-3.15 v2(-8.255,-3.175) ; -7.237,-5.283 -7.239,-5.283
  Bottom Layer w0.127: v1(-34.544,4.394) -33.376,3.226 -33.376,-3.327 -34.417,-4.369 v1@-34.468,-4.369 ; v1(-33.782,4.394) -33.071,3.683 -33.071,-3.671 -33.706,-4.306 v1@-33.706,-4.369 ; v1@-33.045,-4.394 -33.045,-4.383 -32.766,-4.104 -32.766,4.104 -33.02,4.358 v1(-33.02,4.394) ; R13.2@-12.158,-4.191 -12.158,-4.759 -11.989,-4.928 -10.262,-4.928 -10.262,-5.334 -32.207,-5.334 -32.207,5.359 -7.239,5.359 -7.239,-4.039 v1@-8.331,-4.039 ; C7.2 C6.2 -8.966,-4.2 -8.966,-4.675 -8.892,-4.75 -8.433,-4.75 -7.518,-5.664 -6.909,-5.664 -6.909,5.664 -32.487,5.664 -32.487,-5.639 -8.973,-5.639 -8.643,-5.309 v1@-8.636,-5.309 ; C7.2@-8.966,-3.222 C7.2@-8.919,-3.175 ; U3.17@-8.89,0.492 -7.883,0.492 -7.569,0.178 -7.569,-3.175 v2(-8.255,-3.175) -8.85,-3.175 C7.2@-8.876,-3.15
  other v1: -33.782,-4.394 -33.02,-4.394 -34.544,-4.369 -8.204,-4.039
LB: C6.1 C7.1 R13.1 TP5.1 U3.1 | length 4.8
  Top Layer w0.127: v2@-10.846,-3.15 TP5.1
  Bottom Layer w0.127: R13.1 -11.032,-4.14 C6.1 ; v2@-10.846,-3.15 -10.205,-3.15 -10.104,-3.048 C7.1@-10.051,-3.048 ; U3.1@-10.06,-1.961 U3.1 -10.049,-3.046 C7.1@-10.051,-3.048 ; C6.1@-10.051,-3.912 C7.1@-10.051,-3.048
  other v2: -10.897,-3.175
NetC8_1: C8.1 U3.15 U3.18 | length 6.9
  Top Layer w0.152: v1(-10.033,3.658) -10.033,1.753 v1(-8.28,0)
  Bottom Layer w0.152: U3.15 -10.049,3.173 -10.051,3.175 -10.033,3.193 v1(-10.033,3.658) ; U3.18 v1(-8.28,0)
NetC9_2: C9.2 U5.3 U6.1 | length 1.6
  Bottom Layer w0.127: U5.3 -19.8,0.74 v1(-19.8,1.5) -19.8,2.225 C9.2
NetD1_2: D1.2 R8.2 | length 1.7
  Bottom Layer w0.127: D1.2 -18.296,2.454 R8.2@-18.25,2.5
NetD1_3: D1.3 R9.2 | length 1.7
  Bottom Layer w0.152: D1.3 -15.07,0.834 R9.2
NetD1_4: D1.4 R10.2 | length 1.4
  Bottom Layer w0.152: -15.121,-2.159 -15.121,-0.817 D1.4
NetJ1_A5: J1.A5 R11.2 | length 2.3
  Top Layer w0.127: J1.A5@-36.644,-0.75 -35.8,-0.75 -35.471,-1.079 -35.065,-1.079 v1(-35.027,-1.118)
  Bottom Layer w0.127: v1(-35.027,-1.118) -35.027,-1.583 R11.2
P71D600-PWR: C5.2 TP4.1 U2.4 U2.5 U3.12 | length 25.7
  Top Layer w0.127: v1(-20.015,-4.242) -19.634,-4.623 -15.24,-4.623 -11.049,-0.432 -11.049,1.2 ; TP4.1 -11.049,1.2 ; v1(-11.049,3.327) -11.049,1.2
  Bottom Layer w0.127: U2.5 -25.933,-2.21 -25.73,-2.413 -25.425,-2.413 ; U2.4 -25.433,-2.405 -25.425,-2.413 ; v1(-20.015,-4.242) -23.597,-4.242 -25.425,-2.413 ; C5.2@-11.557,3.31 C5.2@-11.549,3.302 ; U3.12 C5.2@-11.549,3.302 ; v1(-11.049,3.327) -11.523,3.327 C5.2@-11.549,3.302
P71D600-SCL: R4.2 TP7.1 U2.2 U3.10 | length 17.4
  Top Layer w0.127: v1(-17.6,-3.85) -16.838,-3.088 -15.865,-3.088 -13.945,-1.168 v1(-13.945,0.991) -13.972,1.018 -13.972,1.972 TP7.1
  Bottom Layer w0.127: U2.2@-24.437,-1.629 -24.437,-2.335 -23.372,-3.399 -18.051,-3.399 v1(-17.6,-3.85) -17.591,-3.859 -17.274,-3.859 R4.2@-17.265,-3.85 ; v1(-13.945,0.991) -13.935,1 U3.10
P71D600-SDA: R3.2 TP9.1 U2.1 U3.11 | length 22.2
  Top Layer w0.127: v1(-16.225,-3.875) -15.559,-3.875 -12.979,-1.295 -12.979,2.8 ; v1(-12.979,3.708) -12.979,2.8 ; TP9.1 -12.979,2.8
  Bottom Layer w0.127: U2.1 -23.933,-2.279 -23.105,-3.108 -16.992,-3.108 -16.55,-3.55 -16.232,-3.868 R3.2 ; v1(-16.225,-3.875) -16.221,-3.871 R3.2@-15.846,-3.871 ; v1(-12.979,3.708) -12.049,2.778 U3.11
RED: R9.1 U2.19 | length 13.5
  Bottom Layer w0.127: U2.19 -26.398,3.41 -26.398,3.904 -25.297,5.005 -16.755,5.005 -16.075,4.325 R9.1@-16.075,2.475
RST: R5.2 TP12.1 U2.3 | length 10.1
  Top Layer w0.127: v1(-19.101,-4.064) -19.101,-3.581 TP12.1
  Bottom Layer w0.127: U2.3 -24.933,-2.321 -23.494,-3.76 -19.101,-3.76 ; v1(-19.101,-4.064) -19.101,-3.76 ; R5.2 -18.458,-3.76 -19.101,-3.76
SWD_CLK: R2.1 U2.26 | length 1.6
  Bottom Layer w0.127: U2.26 -22.549,2.124 -22.275,1.85 R2.1 R2.1@-21.75,1.8
SWD_IO: R1.2 U2.25 | length 1.6
  Bottom Layer w0.127: U2.25 R1.2@-21.751,2.624 ; R1.2@-21.837,2.538 R1.2@-21.751,2.624 ; R1.2 -21.725,2.65 R1.2@-21.751,2.624
TOUCH-SENSE: U2.31 U5.1 | length 2.4
  Bottom Layer w0.203: U2.31 -22.051,-0.376 -21.775,-0.1 U5.1@-21.775,0.665
  Bottom Layer w0.305: U5.1@-21.775,0.665 U5.1
pads on no net: D1.MH1 J1.A2 J1.A3 J1.A8 J1.A10 J1.A11 J1.B2 J1.B3 J1.B5 J1.B6 J1.B7 J1.B8 J1.B10 J1.B11 U2.10 U2.16 U2.17 U2.18 U2.20 U2.22 U2.27 U2.28 U2.29 U2.30 U3.2 U3.3 U3.4 U3.5 U3.6 U3.7 U3.8 U3.9 U3.13 U3.14 U3.16 U3.20

## Keep-outs
Keep-Out Layer:
  circle w0.025: c-3.5,0 r2.75
  circle w0.025: c-30.75,3.75 r1
  circle w0.025: c-5,-4.25 r1
  circle w0.025: c-5,4.25 r1
  circle w0.025: c-30.75,-3.75 r1
  lines w0.025: -37.694,-4.5 -36,-4.5 cw(c-36.005,-6.052) -34.857,-5.008 -34.368,-5.492 ccw(c-33.22,-4.448) -33.225,-6 -6,-6 ccw(c-6,0) 0,0 ccw(c-6,0) -6,6 -33.225,6 ccw(c-33.22,4.448) -34.368,5.492 -34.857,5.008 cw(c-36.005,6.052) -36,4.5 -37.694,4.5

## Other copper
Bottom Layer:
  region net GND: -26.742,-4.824 -26.742,-4.854 -26.317,-4.854 -26.317,-4.574 -26.497,-4.574
  region net +3v3: -26.742,-4.024 -26.497,-4.274 -26.317,-4.274 -26.317,-3.994 -26.742,-3.994
  region net +5v0-VBUS: -27.537,-4.854 -27.112,-4.854 -27.112,-4.824 -27.357,-4.574 -27.537,-4.574
  region net +5v0-VBUS: -27.537,-4.274 -27.357,-4.274 -27.112,-4.024 -27.112,-3.994 -27.537,-3.994

## Silkscreen, mask and mechanical layers (free items; w line width, h text height)
Top Overlay:
  lines w0.025: -37.694,4.15 -37.694,4.15
  text "A" at -10.426,3.009 h5.08 r270
  text "2020-09-26" at -14.422,0.977 h1.45 r270
  text "11-10086" at -13.178,-0.182 h1.45 r270
Bottom Overlay:
  circle w1: c-30.75,-3.75 r1.5
  circle w0.1: c-5,4.25 r1
  circle w0.1: c-5,-4.25 r1
  circle w1: c-30.75,3.75 r1.5
  circle w0.1: c-30.75,3.75 r1
  circle w0.1: c-30.75,-3.75 r1
[8] Board Outline:
  circle w0.025: c-5,-4.25 r1
  circle w0.025: c-5,4.25 r1
  circle w0.025: c-30.742,3.75 r1
  circle w0.025: c-30.75,-3.75 r1
  circle w0.1: c-3.5,0 r2.75
  lines w0.025: -37.694,4.15 -37.694,4.5 -36,4.5 ccw(c-36.005,6.052) -34.857,5.008 -34.368,5.492 cw(c-33.22,4.448) -33.225,6 -6,6 cw(c-6,0) 0,0 cw(c-6,0) -6,-6 -33.225,-6 cw(c-33.22,-4.448) -34.368,-5.492 -34.857,-5.008 ccw(c-36.005,-6.052) -36,-4.5 -37.694,-4.5 -37.694,-4.15 ; -37.694,-4.15 -37.694,-4.15
  text "CUTOUT" at -5.933,4.098 h0.5
  text "CUTOUT" at -31.684,3.601 h0.5
  text "CUTOUT" at -5.758,-0.526 h1.25
  text "CUTOUT" at -31.663,-3.91 h0.5
  text "CUTOUT" at -5.916,-4.456 h0.5

## Text inside footprints (layer, text, board x,y; h text height)
D1: Bottom Overlay "+" at -18.669,-1.448 h1.52 r180